# Altium PCB upper_PCB.PcbDoc
Units mm, origin at the board's own origin, x right, y up, seen from the top; angles counter-clockwise.
Board outline 33 x 32 mm, 2 copper layers (Top Layer, Bottom Layer), stack 1.554 mm thick; 41 components, 23 nets, 125 pads, 111 vias.
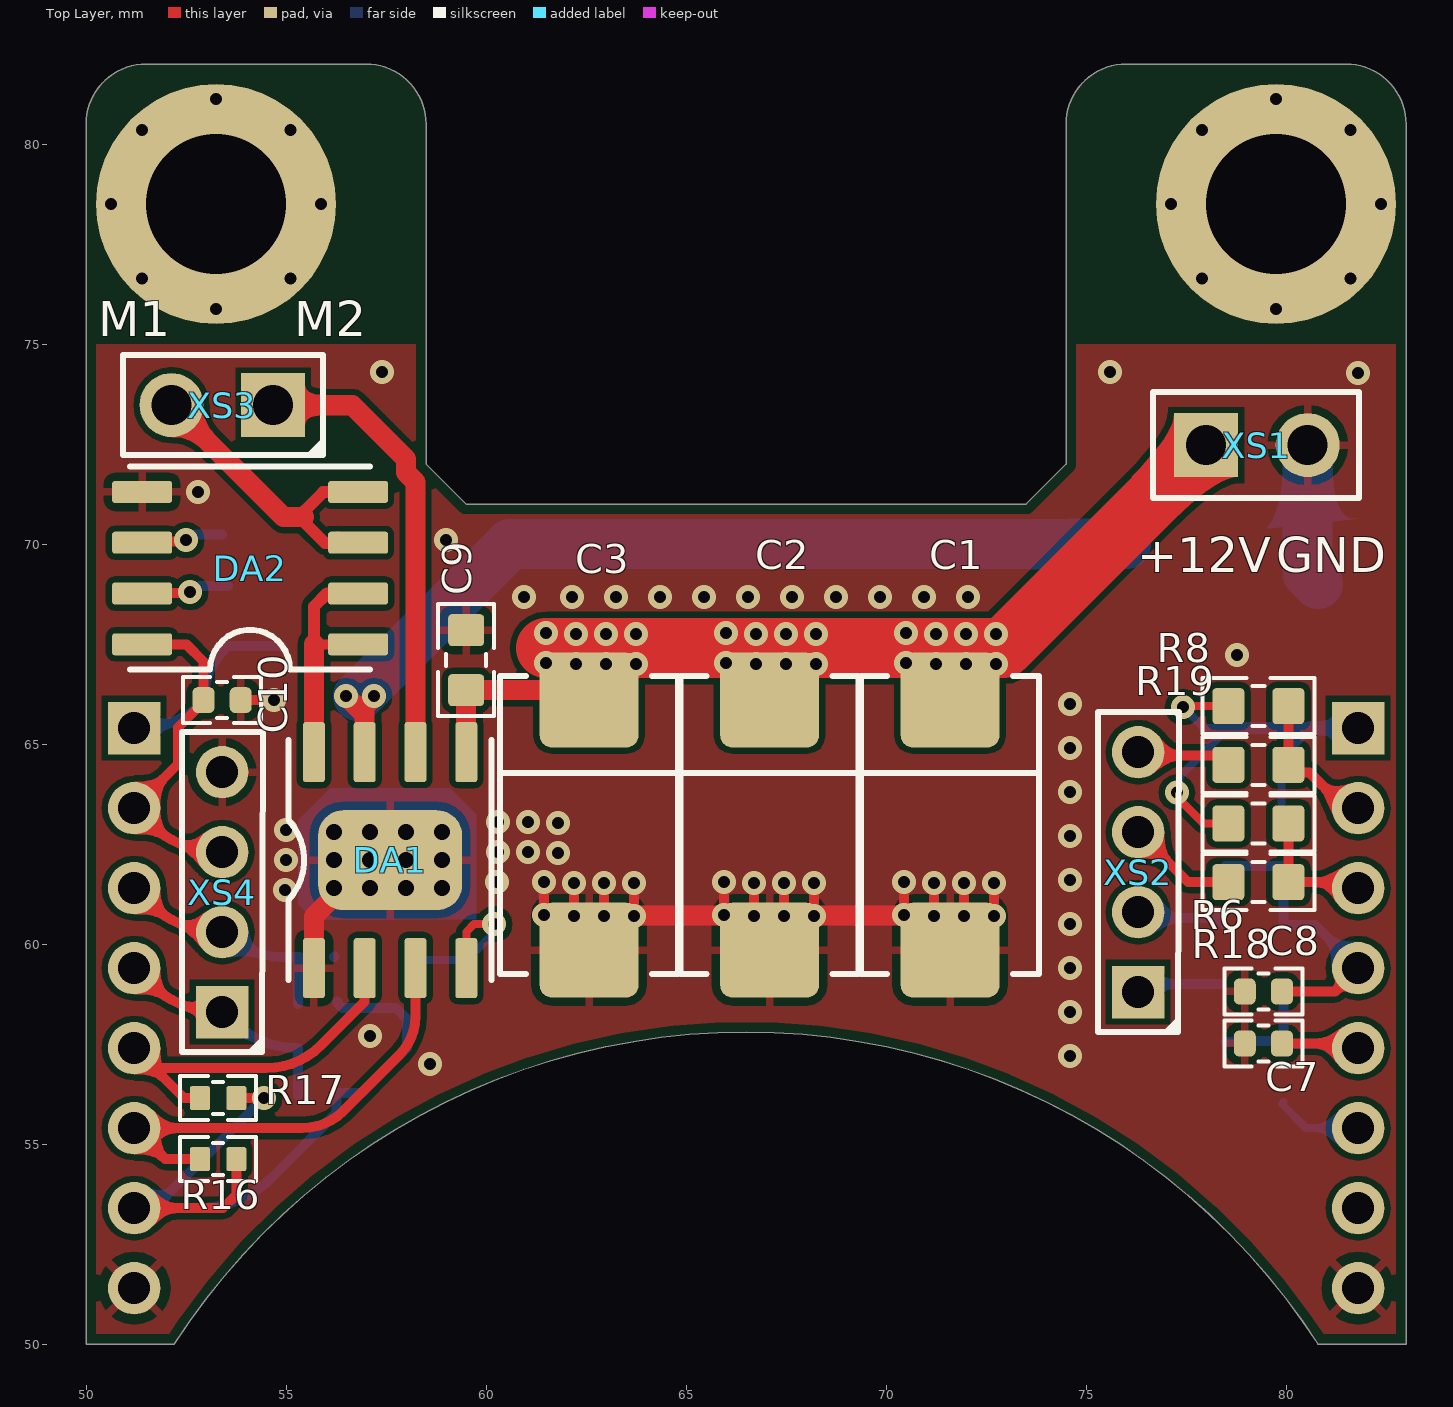
[diagram p0: Top Layer view]
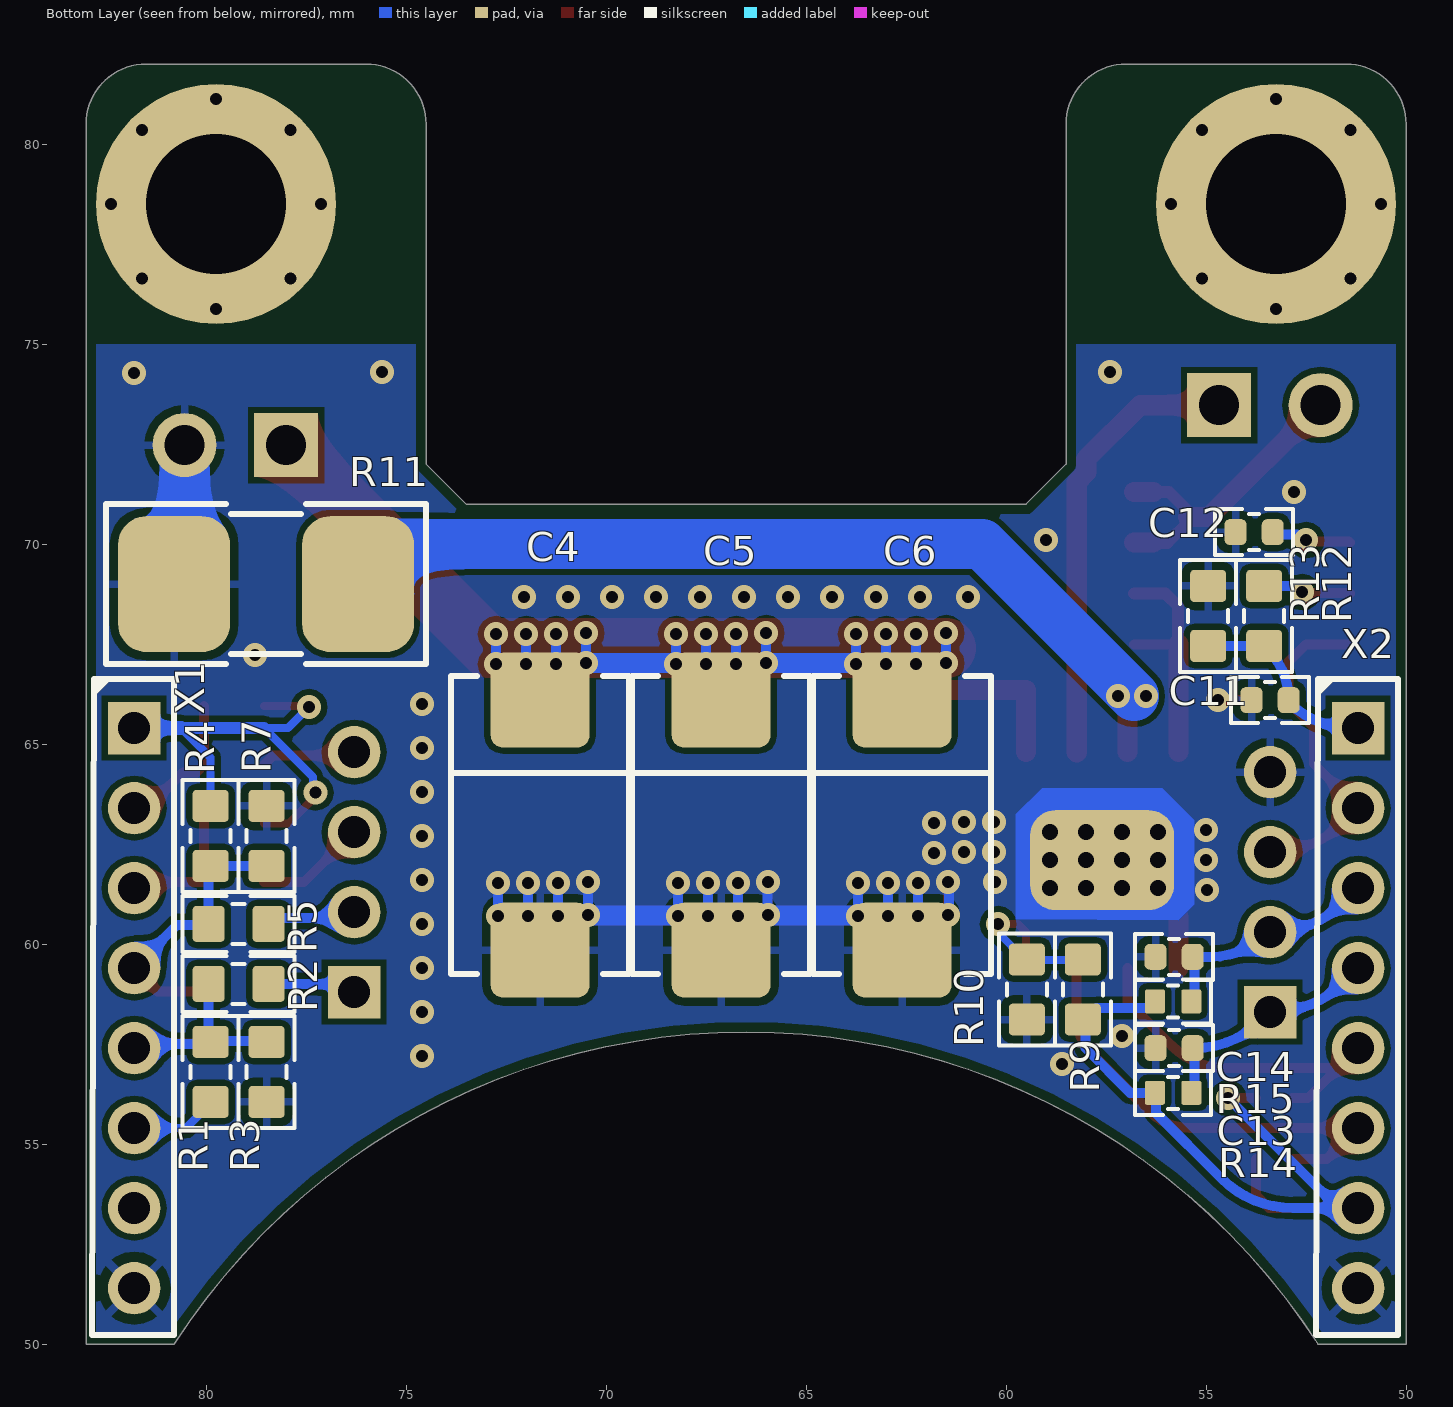
[diagram p1: Bottom Layer view, seen from below]
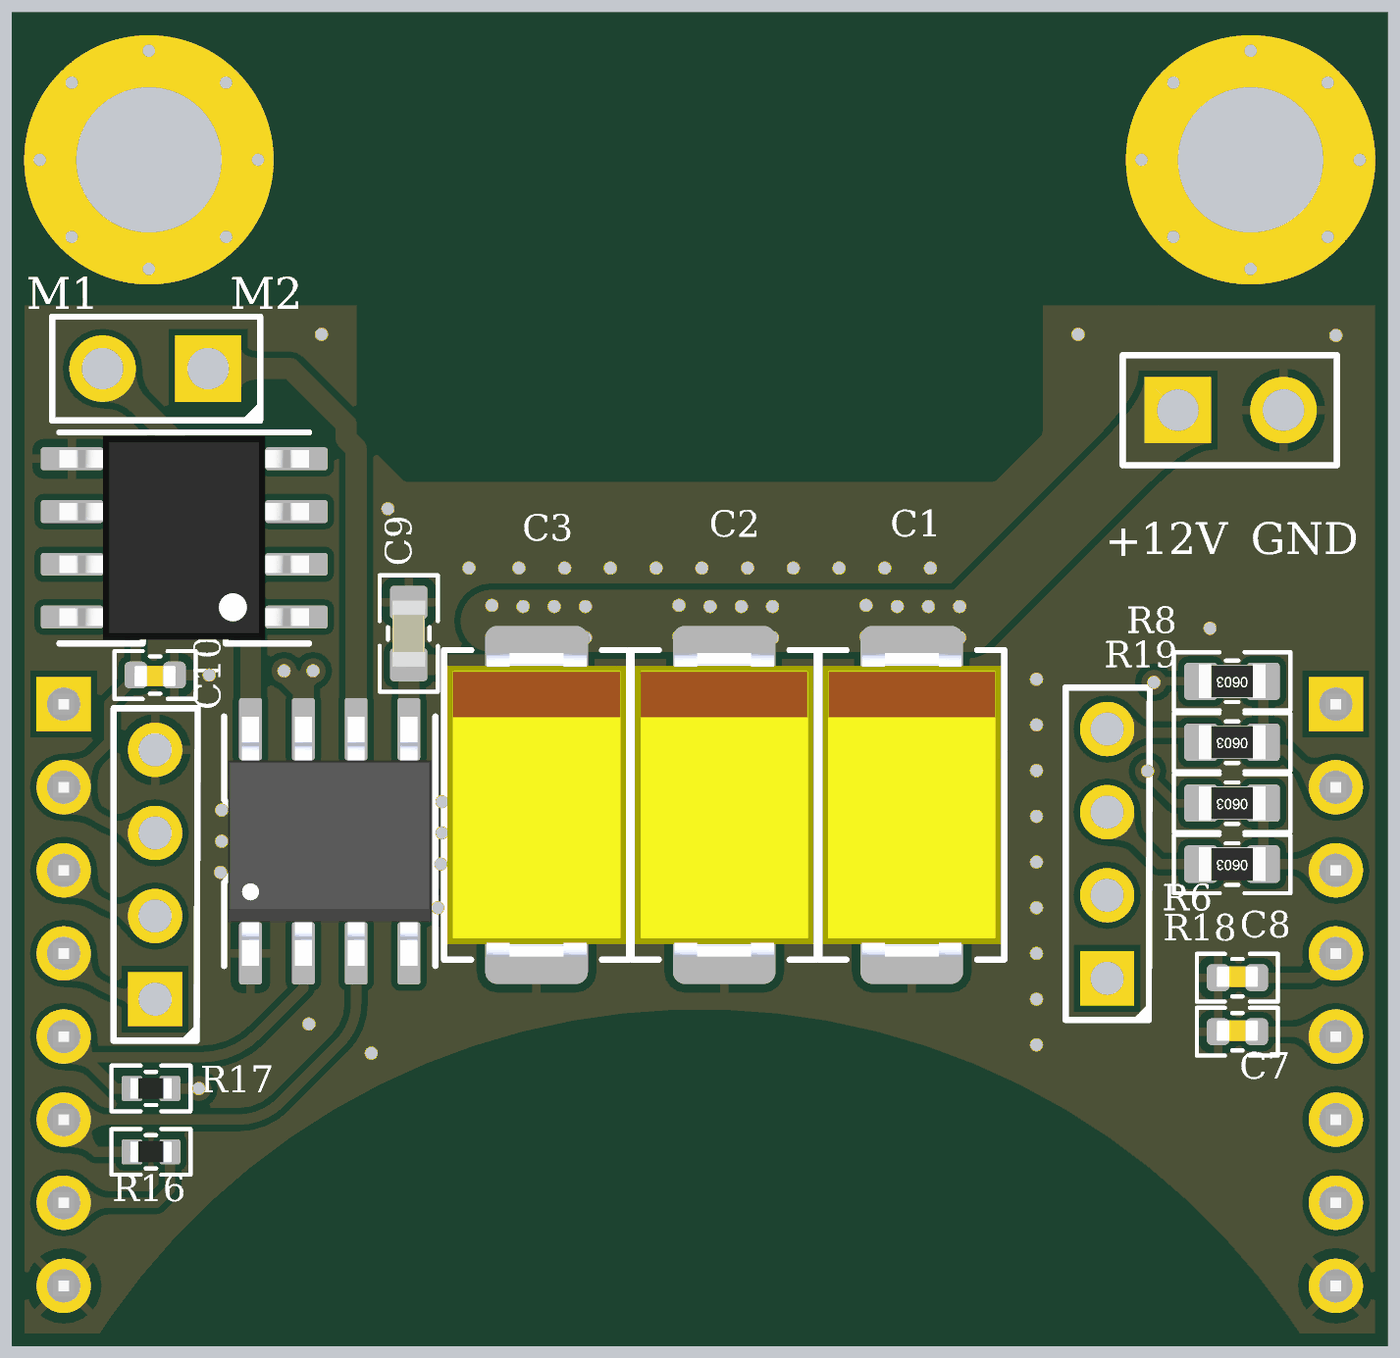
[diagram p2: 3D render of the assembled board from above, using the file's embedded part models]
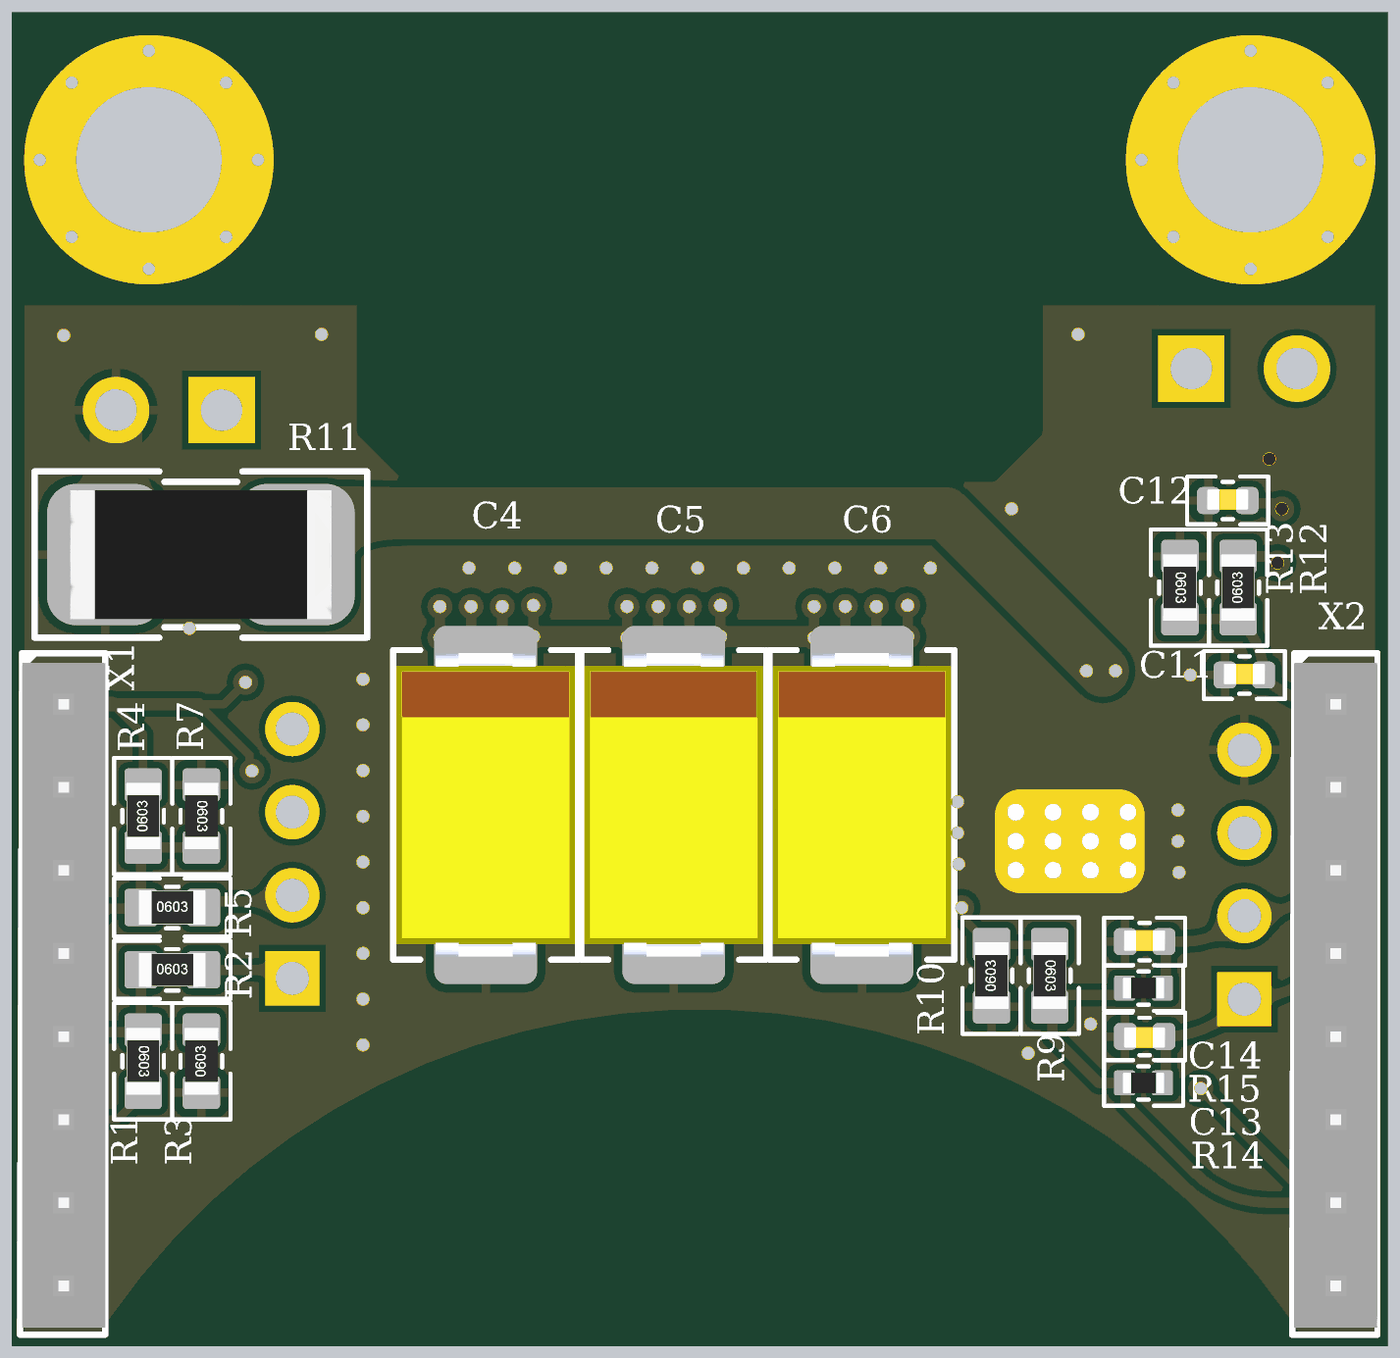
[diagram p3: 3D render of the assembled board from below, using the file's embedded part models]

## Layer stack, top to bottom
Top Solder: solder mask 0.01, Solder Resist, Dk 3.5
Top Layer: signal copper 0.07
Dielectric 2: prepreg 0.125, PP-006, Dk 4.1
Dielectric 1: dielectric 1.164, FR-4, Dk 4.8
Dielectric 3: prepreg 0.125, PP-006, Dk 4.1
Bottom Layer: signal copper 0.07
Bottom Solder: solder mask 0.01, Solder Resist, Dk 3.5

## Board outline
50,50 52.2,50 52.203,49.998 cw(c66.5,40.8) 80.797,49.998 80.8,50 83,50 83,80.5 ccw(c81.5,80.5) 81.5,82 76,82 ccw(c76,80.5) 74.5,80.5 74.5,72 73.5,71 59.5,71 58.5,72 58.5,80.5 ccw(c57,80.5) 57,82 51.5,82 ccw(c51.5,80.5) 50,80.5

## Design rules (kind name [scope] priority, off if disabled: settings)
AcuteAngle [All] p1: minimum=3.50000000000000E+0001 checktracksonly=FALSE
BoardOutlineClearance [All] p1: gap=0.25 ignorepadtopadclearanceinfootprint=FALSE except(0: Arc-SplitContinuation Track-SplitContinuation SMDPad-SplitContinuation THPad-SplitContinuation Via-SplitContinuation Fill-SplitContinuation Poly-SplitContinuation Region-SplitContinuation Text-SplitContinuation)
Clearance Clearance_KeepOutLayer [OnLayer('Keep-Out Layer') vs InNet('No Net')] p1: gap=0.2 ignorepadtopadclearanceinfootprint=FALSE
Clearance [All] p2: gap=0.15 ignorepadtopadclearanceinfootprint=FALSE except(0.2: Arc-Hole Track-Hole SMDPad-Hole THPad-Hole Via-Hole Fill-Hole Poly-Hole Region-Hole Text-Hole)
ComponentClearance [All] p1: gap=0.2 collisioncheckmode=3 verticalgap=0.2 showdistances=FALSE
HoleSize "HoleSize VIA" [IsVia] p1: absolutevalues=TRUE maxlimit=5.9 minlimit=0.3 maxpercent=80.000 minpercent=20.000
HoleSize [IsPad] p2: absolutevalues=TRUE maxlimit=5.9 minlimit=0.6 maxpercent=80.000 minpercent=20.000
HoleToHoleClearance [All] p1: gap=0.25 allowstackedmicrovias=TRUE
MinimumAnnularRing "MinimumAnnularRing VIA" [All] p1: minimumring=0.15
MinimumAnnularRing "MinimumAnnularRing PAD" [IsPAD] p2: minimumring=0.2
MinimumSolderMaskSliver [All] p1: minsoldermaskwidth=0.15
PlaneClearance [All] p1: clearance=0.2
PlaneConnect [All] p1: pad.planeconnectstyle=Relief pad.reliefexpansion=0.2 pad.reliefentries=4 pad.reliefconductorwidth=0.2 pad.reliefairgap=0.2 via.planeconnectstyle=Direct via.reliefexpansion=0.2 via.reliefentries=4 via.reliefconductorwidth=0.2 via.reliefairgap=0.2
PolygonConnect PolygonConnect_Via [IsVia] p1: connectstyle=Direct reliefconductorwidth=0.254 reliefentries=4 polygonreliefangle="90 Angle" airgapwidth=0.254
PolygonConnect [All] p2: thpad.connectstyle=Relief thpad.reliefconductorwidth=0.2 thpad.reliefentries=4 thpad.polygonreliefangle="90 Angle" thpad.airgapwidth=0.2 smdpad.connectstyle=Relief smdpad.reliefconductorwidth=0.2 smdpad.reliefentries=4 smdpad.polygonreliefangle="90 Angle" smdpad.airgapwidth=0.2 via.connectstyle=Direct via.reliefconductorwidth=0.25 via.reliefentries=4 via.polygonreliefangle="90 Angle" via.airgapwidth=0.25
RoutingVias [All] p1: holewidth=0.3 width=0.6 viastyle="Through Hole" minholewidth=0.2 minwidth=0.4 maxholewidth=5.9 maxwidth=6.4
SilkToSilkClearance [All] p1: silktosilkclearance=0
SilkToSolderMaskClearance [IsPad] p1: minsilkscreentomaskgap=0 clearancetoexposedcopper=TRUE
SolderMaskExpansion [isVia] p1: expansion=0.05 istentingtop=TRUE
UnRoutedNet [All] p1: checkbadconnections=TRUE
Width [All] p1: maxlimit=5 minlimit=0.15 preferedwidth=0.25
21 further rules are at their usual default settings.

## Components (designator, comment, footprint, x,y, rotation, side; value= is the part's Value field where it differs from the comment)
C1 "22x35" "CASE D" 71.6,62.975 r270 top
C2 "22x35" "CASE D" 67.087,62.975 r270 top
C3 "22x35" "CASE D" 62.575,62.975 r270 top
C4 "22x35" "CASE D" 71.65,62.975 r270 bottom
C5 "22x35" "CASE D" 67.125,62.975 r270 bottom
C6 "22x35" "CASE D" 62.6,62.975 r270 bottom
C7 "0.01u" 0402_CAP 79.432,57.516 r0 top
C8 "0.01u" 0402_CAP 79.432,58.816 r0 top
C9 "0.1u" 0603_CAP 59.5,67.1 r90 top
C10 "0.1u" 0402_CAP 53.4,66.1 r180 top
C11 "1.0n" 0402_CAP 53.4,66.1 r180 bottom
C12 "1.0n" 0402_CAP 53.8,70.3 r180 bottom
C13 "15p" 0402_CAP 55.8,57.4 r0 bottom
C14 "15p" 0402_CAP 55.8,59.683 r180 bottom
DA1 "A4950ELJTR-T" SOIC-8-ER 57.6,62.1 r90 top
DA2 "ACS712-5" SOIC-8 54.1,69.4 r180 top
R1 "5k1" 0603_RES 79.888,56.805 r270 bottom
R2 "22" 0603_RES 79.188,59.005 r180 bottom
R3 "10k" 0603_RES 78.488,56.805 r90 bottom
R4 "5k1" 0603_RES 79.888,62.705 r90 bottom
R5 "22" 0603_RES 79.188,60.505 r180 bottom
R6 "5k1" 0603_RES 79.305,63.017 r180 top
R7 "10k" 0603_RES 78.488,62.705 r270 bottom
R8 "5k1" 0603_RES 79.305,65.95 r180 top
R9 "18k" 0603_RES 58.082,58.865 r270 bottom
R10 "10k" 0603_RES 59.482,58.865 r90 bottom
R11 "0.1" 2512_res 78.5,69 r0 bottom
R12 "18k" 0603_RES 53.55,68.205 r90 bottom
R13 "10k" 0603_RES 54.95,68.205 r270 bottom
R14 "10k" 0402_res 55.825,56.283 r0 bottom
R15 "10k" 0402_res 55.825,58.567 r0 bottom
R16 "10k" 0402_res 53.3,54.625 r0 top
R17 "10k" 0402_res 53.3,56.15 r0 top
R18 "22" 0603_RES 79.305,61.55 r180 top
R19 "22" 0603_RES 79.305,64.483 r180 top
X1 "PBD-8" Header_8pin_2mm 81.8,58.4 r270 bottom locked
X2 "PBD-8" Header_8pin_2mm 51.2,58.4 r270 bottom locked
XS1 "power_12v" "STEP_2.54mm 2X1" 78,72.475 r90 top
XS2 "TTL" PH4_2mm 76.3,61.8 r90 top
XS3 "OUT" step_2.54_2 54.675,73.475 r180 top
XS4 "ENC" PH4_2mm 53.4,61.3 r90 top

## Footprints (in the part's own frame and the unit in brackets; to place one, negate y for a bottom-side part, rotate by r counter-clockwise, add the part's x,y. Pads: shape width x height; smd on the part's side, far side on the other; paste and mask are expansions set on the pad)
0402_CAP [mm]
  rrect50% 0.55x0.65 smd: 1(-0.465,0) 2(0.465,0)
  silkscreen extent -0.97,-0.58 0.97,0.58, body extent -0.5,-0.22 0.5,0.28, height 0.5
0402_res [mm]
  rrect20% 0.5x0.6 smd: 1(-0.455,0) 2(0.455,0)
  silkscreen extent -0.95,-0.55 0.95,0.55, body extent -0.5,-0.25 0.5,0.25, height 0.35
0603_CAP [mm]
  rrect25% 0.8x0.9 smd: 1(-0.75,0) 2(0.75,0)
  silkscreen extent -1.4,-0.7 1.4,0.7, body extent -0.8,-0.4 0.8,0.4, height 0.8
0603_RES [mm]
  rrect25% 0.8x0.9 smd: 1(-0.75,0) 2(0.75,0)
  silkscreen extent -1.4,-0.7 1.4,0.7, body extent -0.8,-0.41 0.8,0.41, height 0.45
2512_res [mm]
  rrect50% 2.8x3.4 smd: 1(-2.3,0) 2(2.3,0)
  silkscreen extent -4,-2 4,2, body extent -3.15,-1.55 3.15,1.55, height 0.55
"CASE D" [mm]
  rrect25% 2.37x2.47 smd: 1(-3.125,0) 2(3.125,0)
  silkscreen extent -3.73,-2.22 3.72,2.22, body extent -3.65,-2.15 3.65,2.15, height 3.1
Header_8pin_2mm [mm]
  rect 1.308x1.308 / inner round 1.308 / far side rect 1.308x1.308 hole 0.8: 1(-7,0)
  round 1.308 hole 0.8: 2(-5,0) 3(-3,0) 4(-1,0) 5(1,0) 6(3,0) 7(5,0) 8(7,0)
  silkscreen extent -8.23,-1.05 8.18,1, body extent -8,-1 8,1, height 6.48
PH4_2mm [mm]
  rect 1.308x1.308 / inner round 1.308 / far side rect 1.308x1.308 hole 0.8: 1(-3,0)
  round 1.308 hole 0.8: 2(-1,0) 3(1,0) 4(3,0)
  silkscreen extent -4,-1.02 4,1
SOIC-8 [mm]
  rrect25% 1.5x0.55 smd: 1(-2.7,1.905) 2(-2.7,0.635) 3(-2.7,-0.635) 4(-2.7,-1.905) 5(2.7,-1.905) 6(2.7,-0.635) 7(2.7,0.635) 8(2.7,1.905)
  silkscreen extent -3,-2.54 3,2.54, body extent -3,-2.45 3,2.45, height 1.75
SOIC-8-ER [mm]
  rrect25% 1.5x0.55 smd: 1(-2.7,1.905) 2(-2.7,0.635) 3(-2.7,-0.635) 4(-2.7,-1.905) 5(2.7,-1.905) 6(2.7,-0.635) 7(2.7,0.635) 8(2.7,1.905)
  round 0.4 hole 0.4: 1(-0.7,1.4) 1(-0.7,-0.4) 1(-0.7,0.5) 1(-0.7,-1.3) 1(0,1.4) 1(0,0.5) 1(0,-0.4) 1(0,-1.3) 1(0.7,1.4) 1(0.7,-0.4) 1(0.7,0.5) 1(0.7,-1.3)
  rrect50% 2.5x3.6 all layers, no hole: 1(0,0)
  silkscreen extent -3,-2.54 3,2.54, body extent -3,-2.45 3,2.45, height 1.7
step_2.54_2 [mm]
  rect 1.6x1.6 hole 1: 1(0,0)
  round 1.6 hole 1: 2(2.54,0)
  silkscreen extent -1.25,-1.25 3.75,1.25
"STEP_2.54mm 2X1" [mm]
  rect 1.6x1.6 hole 1: 1(0,0)
  round 1.6 hole 1: 2(0,-2.54)
  silkscreen extent -1.33,-3.83 1.33,1.33

## Part data
C1 C2 C3 C4 C5 C6: library part Capacitor_pol, ValueType=Конденсатор
C7 C8 C10 C11 C12 C13 C14: library part Capacitor, Case=0402, ValueType=Конденсатор
C9: library part Capacitor, Case=0603, ValueType=Конденсатор
DA1: ValueDescriptioneter 1=Full-Bridge, ValueManufacturer="Allegro Microsystems", ValueType="ШИМ драйвер двигателей", ComponentLink1Description=chipdip, ComponentLink1URL=https://www.chipdip.ru/product/a4950eljtr-t, NomenclatureNumber=9001130282
DA2: library part CurrentSensor_ACS712-5
R1 R3 R4 R6 R7 R8 R9 R10 R12 R13: library part Resistor, Case=0603, ValueType=Резистор
R2 R5 R18 R19: library part Resistor, Power=0603, ValueType=Резистор
R11: library part Resistor, Case=2512, ValueType=Резистор
R14 R15 R16 R17: library part Resistor, Case=0402, ValueType=Резистор
X1 X2: library part Connecor_8pin, Parameter 8=GND, System=Connector
  X1: Parameter 1=+5V, Parameter 2=B_Out, Parameter 3=A_Out, Parameter 4=B_In, Parameter 5=A_In, Parameter 6=+5V, Parameter 7=+3.3V
  X2: Parameter 1=GND, Parameter 2=+5V, Parameter 3=ENC_B, Parameter 4=ENC_A, Parameter 5=IN2, Parameter 6=IN1, Parameter 7=+5V

## Free pads (board coordinates)
  round 6 hole 3.5 unplated: ""(53.25,78.5) ""(79.75,78.5)

## Via types
v1: diameter 0.6, hole 0.3, Top Layer to Bottom Layer, tented both sides, 95 vias
v2: diameter 0.7/0.7 (per signal layer), hole 0.3, Top Layer to Bottom Layer, tented both sides, 16 vias

## Nets (pads, with @x,y where several pads share a name; then routed paths per layer and width w, separated by ;. In a path a pad name is that pad's centre, name@x,y a point inside that pad or via, vN(x,y) a via of type N, cw(c..) or ccw(c..) an arc to the next point about the centre after c; other vN are vias at no path point)
+5V: C10.2 DA2.8 R1.2 R4.2 R6.2 R8.2 R9.2 R14.2 R15.2 R16.2 R17.2 X1.1 X1.6 X2.2 X2.7 XS4.3 | length 42.2
  Top Layer w0.2: v1(77.271,63.79) 77.271,63.681 77.474,63.478 77.474,63.476 77.933,63.017 R6.2 ; v1(77.425,65.925) 77.45,65.95 R8.2
  Top Layer w0.25: X2.7 53.425,53.4 53.755,53.73 R16.2 ; DA2.8 52.505,67.495 52.935,67.065 C10.2 52.935,66.05 52.3,65.415 52.3,64.5 X2.2 51.556,63.044 ccw(c53.352,64.84) 53.352,62.3 XS4.3 ; R17.2 v1(54.45,56.15)
  Bottom Layer w0.2: v1(77.271,63.79) 77.328,63.847 77.328,64.178 78.55,65.4 77.95,65.4 v1(77.425,65.925) ; R4.2 79.888,64.663 80.625,65.4 ; R1.2@79.938,56.055 79.892,56.008 80.5,55.4 X1.6
  Bottom Layer w0.25: X2.7 X2.7@51.7,53.4 ; v1(54.45,56.15) X2.7@51.7,53.4 ; R14.2@56.19,56.283 56.9,56.283 58.017,57.4 58.017,58.13 57.747,58.4 56.405,58.4 56.28,58.525 R15.2 ; R14.2 56.258,56.262 56.258,55.783 54.619,54.144 cw(c52.823,55.94) 52.823,53.4 X2.7@51.7,53.4
  Bottom Layer w0.3: 78.55,65.4 80.625,65.4
  Bottom Layer w0.35: 80.625,65.4 X1.1
+12V: C1.1 C2.1 C3.1 C4.1 C5.1 C6.1 C9.1 DA1.5 XS1.1 | length 52.7
  Top Layer w0.25: v1(61.5,67.777) 61.5,67.402 v1(61.5,67.027) 61.575,67.102 C3.1@61.571,67.106 ; v1(62.25,67) 62.25,67.402 v1(62.25,67.75) ; v1(63,67) 63,67.402 v1(63,67.75) ; v1(63.75,67) 63.75,67.402 v1(63.75,67.75) ; v1(66,67.027) 66,67.402 v1(66,67.777) ; v1(66.75,67) 66.75,67.402 v1(66.75,67.75) ; v1(67.5,67) 67.5,67.402 v1(67.5,67.75) ; v1(68.25,67) 68.25,67.402 v1(68.25,67.75) ; v1(70.5,67.027) 70.5,67.402 v1(70.5,67.777) ; v1(71.25,67) 71.25,67.402 v1(71.25,67.75) ; v1(72,67) 72,67.402 v1(72,67.75) ; v1(72.75,67) 72.75,67.402 v1(72.75,67.75)
  Top Layer w0.5: DA1.5 59.502,64.802 59.502,66.348 C9.1 62.325,66.35 C3.1
  Top Layer w1.5: 61.5,67.402 62.25,67.402 63,67.402 63.75,67.402 66,67.402 66.75,67.402 67.5,67.402 68.25,67.402 70.5,67.402 71.25,67.402 72,67.402 72.75,67.402 72.927,67.402 XS1.1
  Bottom Layer w0.25: v1(61.5,67.027) v1(61.5,67.777) ; v1(62.25,67) 62.25,67.027 v1(62.25,67.75) ; v1(63,67) 63,67.027 v1(63,67.75) ; v1(63.75,67) 63.75,67.027 v1(63.75,67.75) ; v1(66,67.027) v1(66,67.777) ; v1(66.75,67) 66.75,67.027 v1(66.75,67.75) ; v1(67.5,67) 67.5,67.027 v1(67.5,67.75) ; v1(68.25,67) 68.25,67.027 v1(68.25,67.75) ; v1(70.5,67.027) v1(70.5,67.777) ; v1(71.25,67) 71.25,67.027 v1(71.25,67.75) ; v1(72,67) 72,67.027 v1(72,67.75) ; v1(72.75,67) 72.75,67.027 v1(72.75,67.75)
  Bottom Layer w0.5: v1(61.5,67.027) 62.25,67.027 63,67.027 63.75,67.027 v1(66,67.027) 66.75,67.027 67.5,67.027 68.25,67.027 v1(70.5,67.027) 71.25,67.027 72,67.027 C4.1@72.75,67.027
AN_ACS: C11.2 R12.1 R13.2 X2.1 | length 4.8
  Bottom Layer w0.25: X2.1 51.366,65.4 ccw(c51.366,67.619) C11.2@52.934,66.049 ; C11.2@52.935,66.05 C11.2 cw(c54.721,66.1) 53.458,67.363 R12.1 ; R12.1@53.55,67.45 R13.2@54.9,67.45
ENC_A: C13.1 R14.1 X2.4 XS4.1 | length 8.4
  Top Layer w0.25: X2.4 51.556,59.044 ccw(c53.352,60.84) 53.352,58.3 XS4.1
  Bottom Layer w0.25: X2.4 51.556,59.044 ccw(c53.352,60.84) 53.352,58.3 XS4.1 53.596,58.104 ccw(c55.295,59.802) 55.295,57.4 R14.1@55.295,56.221
ENC_B: C14.2 R15.1 X2.3 XS4.2 | length 8.4
  Top Layer w0.25: X2.3 51.556,61.044 ccw(c53.352,62.84) 53.352,60.3 XS4.2
  Bottom Layer w0.25: X2.3 51.556,61.044 ccw(c53.352,62.84) 53.352,60.3 XS4.2 ccw(c54.889,61.789) 54.889,59.683 C14.2@55.295,59.683 ; R15.1@55.295,58.505 C14.2@55.295,59.683 ; C14.2 C14.2@55.295,59.683
GND: C1.2 C2.2 C3.2 C4.2 C5.2 C6.2 C7.1 C8.1 C9.2 C10.1 C11.1 C12.1 C13.2 C14.1 DA1.1 DA2.5 R3.1 R7.1 R10.1 R11.2 R13.1 X1.8 X2.8 XS1.2 XS4.4 | length 50.4
  Top Layer w0.25: C10.1 v1(54.7,66.1) ; v1(61.45,60.727) v1(61.45,61.55) ; v1(62.2,60.7) 62.2,60.714 v1(62.2,61.523) ; v1(62.95,60.7) 62.95,60.714 v1(62.95,61.523) ; v1(63.7,60.7) 63.7,60.714 v1(63.7,61.523) ; v1(65.95,60.727) v1(65.95,61.55) ; v1(66.7,60.7) 66.7,60.714 v1(66.7,61.523) ; v1(67.45,60.7) 67.45,60.714 v1(67.45,61.523) ; v1(68.2,60.7) 68.2,60.714 v1(68.2,61.523) ; v1(70.45,60.727) v1(70.45,61.55) ; v1(71.2,60.7) 71.2,60.714 v1(71.2,61.523) ; v1(71.95,60.7) 71.95,60.714 v1(71.95,61.523) ; v1(72.7,60.7) v1(72.7,61.523)
  Top Layer w0.5: DA1.1@55.695,59.4 55.695,60.695 57.1,62.1 57.6,62.1 DA1.1@58.158,61.542 ; v1(61.45,60.727) 61.464,60.714 62.2,60.714 62.95,60.714 63.7,60.714 66.7,60.714 67.45,60.714 68.2,60.714 71.2,60.714 71.95,60.714 72.686,60.714 v1(72.7,60.7) ; v1@72.681,61.542 v1(72.7,61.523)
  Bottom Layer w0.25: C14.1@56.2,59.683 C14.1@56.208,59.692 ; C6.2@61.429,60.758 v1@61.429,61.508 ; v1(62.2,60.7) 62.2,60.714 v1@62.2,61.45 ; v1(62.95,60.7) 62.95,60.714 v1@62.95,61.45 ; v1(63.7,60.7) 63.7,60.714 v1@63.7,61.45 ; C5.2@65.964,60.737 v1@65.964,61.487 ; v1(66.7,60.7) 66.7,60.714 v1@66.7,61.45 ; v1(67.45,60.7) 67.45,60.714 v1@67.45,61.45 ; v1(68.2,60.7) 68.2,60.714 v1@68.2,61.45 ; v1(70.45,60.727) v1@70.45,61.477 ; v1(71.2,60.7) 71.2,60.714 v1@71.2,61.45 ; v1(71.95,60.7) 71.95,60.714 v1@71.95,61.45 ; v1(72.7,60.7) v1@72.7,61.45
  Bottom Layer w0.5: v1(61.45,60.727) 61.464,60.714 62.2,60.714 62.95,60.714 63.7,60.714 66.7,60.714 67.45,60.714 68.2,60.714 71.2,60.714 71.95,60.714 72.686,60.714 v1(72.7,60.7)
  Bottom Layer w1.25: XS1.2 80.54,69.26 R11.2
  other v1: 58.6,57 74.6,57.2 57.1,57.7 74.6,58.3 74.6,59.4 74.6,60.5 54.973,61.35 60.273,61.55 74.6,61.6 55,62.1 61.8,62.273 60.3,62.3 61.05,62.3 74.6,62.7 55,62.85 61.8,63.023 60.3,63.05 61.05,63.05 74.6,63.8 74.6,64.9 74.6,66 78.775,67.225 60.95,68.675 62.15,68.675 63.25,68.675 64.35,68.675 65.45,68.675 66.55,68.675 67.65,68.675 68.75,68.675 69.85,68.675 70.95,68.675 72.05,68.675 59,70.1 52.8,71.3 81.8,74.275 57.4,74.3 75.6,74.3
IN1: DA1.3 R16.1 X2.6 | length 11.6
  Top Layer w0.25: R16.1 51.975,54.625 X2.6 55.4,55.4 ccw(c55.4,56.849) 56.424,55.824 ; 56.424,55.824 57.835,57.235 ccw(c56.871,58.2) 58.235,58.2 DA1.3
IN2: DA1.2 R17.1 X2.5 | length 9.6
  Top Layer w0.25: R17.1 52.45,56.15 X2.5 51.302,57.4 51.802,56.9 54.5,56.9 ccw(c54.5,58.831) 55.866,57.466 56.965,58.565 DA1.2
NetC12_2: C12.2 DA2.6 | length 2.1
  Top Layer w0.25: DA2.6 51.433,70.068 52.467,70.068 v1(52.5,70.1)
  Bottom Layer w0.25: v1(52.5,70.1) 52.595,70.1 52.73,70.235 C12.2@53.4,70.235
NetDA1_4: DA1.4 R9.1 R10.2 | length 4.3
  Top Layer w0.2: DA1.4 59.505,60.305 59.7,60.5 v1(60.2,60.5)
  Bottom Layer w0.2: R9.1@58.15,59.6 59.65,59.6 59.65,59.733 60.123,60.207 60.123,60.423 v1(60.2,60.5)
NetDA1_6: DA1.6 XS3.1 | length 11.3
  Top Layer w0.508: XS3.1 56.65,73.475 57.996,72.129 57.996,71.791 58.235,71.552 DA1.6
NetDA1_7: DA1.7 R11.1 | length 22.9
  Top Layer w0.5: v1(56.5,66.2) 56.965,65.735 ; DA1.7 56.965,65.735 ; v1(57.2,66.2) 57.2,66.173 56.965,65.938 56.965,65.735
  Bottom Layer w1.25: 56.8,66.2 60.599,69.999 75.999,69.999 R11.1@76,70
NetDA1_8: DA1.8 DA2.1 DA2.2 | length 6
  Top Layer w0.25: 55.695,67.5 55.7,67.495 DA2.1
  Top Layer w0.3: 55.7,67.495 55.7,68.444 56.021,68.765 DA2.2
  Top Layer w0.5: DA1.8 55.695,67.5
NetDA2_3: DA2.3 DA2.4 XS3.2 | length 7.9
  Top Layer w0.3: DA2.3@56.293,70.032 55.968,70.032 55.45,70.55 55.45,70.825 55.925,71.3 DA2.4@56.32,71.3
  Top Layer w0.5: XS3.2 54.938,70.672 55.45,70.672 ; DA2.3@56.3,70.06 56.325,70.035 DA2.3 ; DA2.4@56.32,71.3 56.325,71.305 DA2.4
NetDA2_7: DA2.7 R12.2 | length 2.2
  Top Layer w0.25: DA2.7 51.417,68.782 52.582,68.782 v1(52.6,68.8)
  Bottom Layer w0.25: v1(52.6,68.8) 52.695,68.8 52.85,68.955 R12.2
NetR18_2: R18.2 XS2.3 | length 2.8
  Top Layer w0.25: XS2.3 77.55,61.55 R18.2
NetR19_2: R19.2 XS2.4 | length 2.4
  Top Layer w0.25: XS2.4 76.386,64.714 78.324,64.714 R19.2
TTL_A_IN: R2.2 XS2.1 | length 2.1
  Bottom Layer w0.25: XS2.1@76.3,59 R2.2@78.35,59
TTL_A_IN_GPIO: C7.2 R1.1 R2.1 R3.2 X1.5 | length 6.8
  Top Layer w0.25: C7.2 81.684,57.516 X1.5
  Bottom Layer w0.25: R3.2 78.813,57.584 79.563,57.584 R1.1 79.938,57.83 R2.1 ; R1.1@79.9,57.504 81.696,57.504 X1.5
TTL_A_OUT_GPIO: R6.1 R18.1 X1.3 | length 3.3
  Top Layer w0.25: R6.1 R18.1 81.65,61.55 X1.3
TTL_B_IN: R5.2 XS2.2 | length 2.2
  Bottom Layer w0.25: XS2.2 76.45,60.65 R5.2@78.2,60.65 ; R5.2@78.288,60.655 R5.2
TTL_B_IN_GPIO: C8.2 R4.1 R5.1 R7.2 X1.4 | length 7.4
  Top Layer w0.25: C8.2@79.815,58.816 81.216,58.816 X1.4
  Bottom Layer w0.25: R7.2 R4.1 79.938,61.905 R5.1 79.968,60.475 80.725,60.475 X1.4
TTL_B_OUT_GPIO: R8.1 R19.1 X1.2 | length 3.7
  Top Layer w0.25: R8.1 R19.1 80.243,64.295 80.58,64.295 81.273,63.602 81.598,63.602 X1.2
pads on no net: X1.7
copper on no net:
  other v2: 53.25,75.875 79.75,75.875 51.394,76.644 55.106,76.644 77.894,76.644 81.606,76.644 50.625,78.5 55.875,78.5 77.125,78.5 82.375,78.5 51.394,80.356 55.106,80.356 77.894,80.356 81.606,80.356 53.25,81.125 79.75,81.125

## Polygon pours and split planes (outlines as drawn)
GND on Top Layer "GND_L01_P000" (solid, remove dead copper, pour order 0): 50,50 52.2,50 52.203,49.998 cw(c66.5,40.8) 80.797,49.998 80.8,50 83,50 83,80.5 ccw(c81.5,80.5) 81.5,82 76,82 ccw(c76,80.5) 74.5,80.5 74.5,72 73.5,71 59.5,71 58.5,72 58.5,80.5 ccw(c57,80.5) 57,82 51.5,82 ccw(c51.5,80.5) 50,80.5
GND on Bottom Layer "GND_L02_P001" (solid, remove dead copper, pour order 1): 50,50 52.2,50 52.203,49.998 cw(c66.5,40.8) 80.797,49.998 80.8,50 83,50 83,80.5 ccw(c81.5,80.5) 81.5,82 76,82 ccw(c76,80.5) 74.5,80.5 74.5,72 73.5,71 59.5,71 58.5,72 58.5,80.5 ccw(c57,80.5) 57,82 51.5,82 ccw(c51.5,80.5) 50,80.5

## Other copper
Bottom Layer:
  region net GND: 59.757,60.618 59.757,63.243 59.1,63.9 56.1,63.9 55.3,63.1 55.3,61 55.7,60.6
Multi-Layer:
  pour cut-out: 82.9,75 82.8,75.1 82.8,81.9 74.2,81.9 74.3,81.8 74.3,75
  pour cut-out: 50.1,75 50.2,75.1 50.2,81.9 58.8,81.9 58.7,81.8 58.7,75

## Silkscreen, mask and mechanical layers (free items; w line width, h text height)
Top Overlay:
  text "M1" at 50.301,74.912 h1.5
  text "M2" at 55.201,74.912 h1.5
  text "+12V" at 76.275,69.012 h1.5
  text "GND" at 79.75,69.012 h1.5
Board Shape:
  the board outline again, w0.1